# EAGLE board Schematic (EAGLE 7.3.0)

Size 100 x 80 mm. Coordinates in mm from the lower left corner, seen from the top.
Outline: 0,0 100,0 100,80 0,80 0,0
Copper layers (1*16): Top 0.035mm / dielectric 1.5mm / Bottom 0.035mm
Design rules "default": minimum track width 10mil, minimum drill 24mil, track to track 8mil, track to pad 8mil, pad to pad 8mil, via to via 8mil, smd to smd 8mil, copper to edge 40mil, drill to drill 8mil, minimum pad ring 10mil, minimum via ring 8mil, stop-mask expansion 4mil, vias tented up to drill 0mil, thermal gap 10mil
Holes 5 mm at 3.81,10.16 24.13,76.2 95.25,74.93 64.77,7.62

## Footprints (pad centres in the part's own frame; a part is rotated, then mirrored left to right if it is on the bottom)
1X03/90 = drill 1.016 long: 1 -2.54,-3.81; 2 0,-3.81; 3 2.54,-3.81
R1206 = smd 1.6 x 1.803: 1 -1.422,0; 2 1.422,0
C1608 = smd 1.1 x 1: 1 -0.85,0; 2 0.85,0
DO214AA = smd 1.8 x 2.2: A 2.55,0; C -2.55,0
TQFP32-08 = smd 1.27 x 0.559: 1 -4.293,2.8; 2 -4.293,2; 3 -4.293,1.2; 4 -4.293,0.4; 5 -4.293,-0.4; 6 -4.293,-1.2; 7 -4.293,-2; 8 -4.293,-2.8; 17 4.293,-2.8; 18 4.293,-2; 19 4.293,-1.2; 20 4.293,-0.4; 21 4.293,0.4; 22 4.293,1.2; 23 4.293,2; 24 4.293,2.8 | smd 0.559 x 1.27: 9 -2.8,-4.293; 10 -2,-4.293; 11 -1.2,-4.293; 12 -0.4,-4.293; 13 0.4,-4.293; 14 1.2,-4.293; 15 2,-4.293; 16 2.8,-4.293; 25 2.8,4.293; 26 2,4.293; 27 1.2,4.293; 28 0.4,4.293; 29 -0.4,4.293; 30 -1.2,4.293; 31 -2,4.293; 32 -2.8,4.293
DCJ0202 = drill 1 pad 2 long: 1 0,3.1; 2 4.8,0; 3 0,-3
1X06/90 = drill 1.016 long: 1 -6.35,-3.81; 2 -3.81,-3.81; 3 -1.27,-3.81; 4 1.27,-3.81; 5 3.81,-3.81; 6 6.35,-3.81
TO92-INLINE = drill 0.813 pad 1.676 octagon: 1 -2.159,0; 2 0,0; 3 2.159,0
MICRO3 = smd 0.8 x 0.9: 1 -0.95,-1; 2 0.95,-1; 3 0,1
B3F-10XX = drill 1.016 long: 1 -3.251,2.261; 2 3.251,2.261; 3 -3.251,-2.261; 4 3.251,-2.261
CR03N = drill 1.321 pad 3.15 octagon: + -5.08,-5.08; +@1 -5.08,5.08; - 6.985,0
SMC_C = smd 2.4 x 2.4: + -2.5,0; - 2.5,0
SOIC-16W = smd 0.6 x 2.2: 1 -4.445,-4.6; 2 -3.175,-4.6; 3 -1.905,-4.6; 4 -0.635,-4.6; 5 0.635,-4.6; 6 1.905,-4.6; 7 3.175,-4.6; 8 4.445,-4.6; 9 4.445,4.6; 10 3.175,4.6; 11 1.905,4.6; 12 0.635,4.6; 13 -0.635,4.6; 14 -1.905,4.6; 15 -3.175,4.6; 16 -4.445,4.6
M1206 = smd 1.6 x 2: 1 -1.4,0; 2 1.4,0
SDCARD = smd 1.2 x 4: 1 6.8,0.89; 2 4.3,0.89; 3 1.8,0.89; 4 -0.7,0.89; 5 -3.1,0.89; 6 -5.7,0.89; 7 -8.1,0.89; 8 -9.8,0.89; 9 9.3,0.89; CD -12.5,0.89 | smd 2.032 x 2.032: COM -14.2,-9.3; WP -14.2,-19 | smd 1.7 x 1.8: MT1 -14.5,-3.91 | smd 1.9 x 1.9: MT2 14.7,-3.91; MT3 14.6,-19.01 | hole 1.5: -12,-23.31 | hole 1: 12,-23.31
SFH206 = drill 0.813 long: A 0,-1.27; K 0,1.27
SO08 = smd 0.6 x 2.2: 1 -1.905,-2.6; 2 -0.635,-2.6; 3 0.635,-2.6; 4 1.905,-2.6; 5 1.905,2.6; 6 0.635,2.6; 7 -0.635,2.6; 8 -1.905,2.6
LED5MM = drill 0.813 pad 1.676 octagon: A -1.27,0; K 1.27,0
MOLEX_52207-0485 = smd 0.61 x 1.905: 1 1.499,4.801; 2 0.508,4.801; 3 -0.508,4.801; 4 -1.499,4.801 | smd 2.108 x 2.794: 5 -4.648,7.137; 6 4.648,7.137

## Placement (x,y rotation side)
1WIRE1:JP1  [1X03/90]  48.26,63.5 0 top
1WIRE1:R2  4,7k  [R1206]  48.26,53.34 0 top
C4  100nF  [C1608]  17.78,62.23 0 top
D1  [DO214AA]  59.69,62.23 0 top
IC1  MEGA8-AI  [TQFP32-08]  29.21,41.91 0 top
J1  DCJ0202  [DCJ0202]  5.08,55.88 90 top
JP1  FTDI friend  [1X06/90]  7.62,71.12 270 top
POWER_SUPPLY1:C1  0.33nF  [C1608]  8.89,41.91 0 top
POWER_SUPPLY1:C2  100nF  [C1608]  8.89,38.1 0 top
POWER_SUPPLY1:C3  100nF  [C1608]  3.81,41.91 0 top
POWER_SUPPLY1:IC2  MCP1700 3302E  [TO92-INLINE]  10.16,46.99 0 top
Q1  IRLML5203  [MICRO3]  66.04,54.61 0 top
R1  1M  [R1206]  15.24,27.94 90 top
R2  10k  [R1206]  64.77,41.91 0 top
R3  10k  [R1206]  63.5,35.56 0 top
RESET  [B3F-10XX]  6.35,27.94 0 top
RTC1:BACKUP_BAT  CR03N  [CR03N]  27.94,24.13 90 top
RTC1:C1  [SMC_C]  40.64,22.86 180 top
RTC1:C2  [SMC_C]  40.64,29.21 0 top
RTC1:IC1  [SOIC-16W]  52.07,25.4 0 top
RTC1:R1  [M1206]  45.72,38.1 0 top
RTC1:R2  [M1206]  54.61,38.1 0 top
SD1:R2  10k  [M1206]  77.47,48.26 90 top
SD1:U$1  SDMMC18650  [SDCARD]  83.82,30.48 0 top
VIZ1:D1  SFH206  [SFH206]  76.2,67.31 0 top
VIZ1:IC1  LM358D  [SO08]  86.36,68.58 0 top
VIZ1:LED1  [LED5MM]  87.63,59.69 0 top
VIZ1:R1  1M  [R1206]  77.47,59.69 0 top
VIZ1:R2  22k  [R1206]  69.85,72.39 0 top
VIZ1:R3  180k  [R1206]  71.12,62.23 0 top
VIZ1:R4  [R1206]  1.27,-5.08 0 top  (outside the outline)
VIZ1:U1  52207-0485  [MOLEX_52207-0485]  49.53,0 0 top
WAKE_UP  [B3F-10XX]  6.35,19.05 0 top

## Library data of the parts
1WIRE1:JP1 = pinhead; OC_FARNELL: unknown
1WIRE1:R2 = resistor; MF: PANASONIC ELECTRONIC COMPONENTS; MPN: ERJB1AF472U; OC_FARNELL: 2293982RL
C4 POWER_SUPPLY1:C2 POWER_SUPPLY1:C3 = eagle-ltspice; MF: AVX; MPN: 02016D104KAT2A; OC_FARNELL: 2280755; SPICEMODEL: NONE; SPICEPREFIX: C
D1 = diode; OC_FARNELL: unknown
IC1 = avr-6; OC_FARNELL: unknown
J1 = con-jack; OC_FARNELL: unknown; OC_NEWARK: unknown
JP1 = pinhead; OC_FARNELL: unknown; VV: v,,v
POWER_SUPPLY1:C1 = eagle-ltspice; MF: AVX; MPN: 0201YC331KAT2A; OC_FARNELL: 1327618RL; SPICEMODEL: NONE; SPICEPREFIX: C
POWER_SUPPLY1:IC2 = adafruit; MF: MICROCHIP; MPN: MCP1700-3302E/TO; OC_FARNELL: 1296588
Q1 = transistor-power; MF: FAIRCHILD SEMICONDUCTOR; MPN: FDN360P; OC_FARNELL: 9846336
R1 = resistor; OC_FARNELL: unknown
R2 R3 RTC1:C1 RTC1:C2 SD1:R2 VIZ1:R1 VIZ1:R2 = rcl; OC_FARNELL: unknown
RESET WAKE_UP = switch-omron; MF: OMRON ELECTRONIC COMPONENTS; MPN: B3F-1000; OC_FARNELL: 176432; OC_NEWARK: 36M3542
RTC1:BACKUP_BAT = battery; OC_FARNELL: unknown
RTC1:IC1 = DS3231_industrialberry; OC_FARNELL: unknown
RTC1:R1 RTC1:R2 = resistor; MF: BOURNS; MPN: CRM1206-FX-10R0ELF; OC_FARNELL: 1865248RL
SD1:U$1 = adafruit; OC_FARNELL: unknown
VIZ1:D1 = opto-trans-siemens; MF: OSRAM; MPN: SFH206K; OC_FARNELL: 1212741; OC_NEWARK: 01M8807
VIZ1:IC1 = linear; MF: TEXAS INSTRUMENTS; MPN: LM358DR; OC_FARNELL: 1648685
VIZ1:LED1 = adafruit; MF: WURTH ELEKTRONIK; MPN: 151053GS03000; OC_FARNELL: 2322123
VIZ1:R3 = rcl; MF: TE CONNECTIVITY; MPN: CRGH1206F180K; OC_FARNELL: 2332170
VIZ1:R4 = rcl
VIZ1:U1 = Molex_By_element14_Batch_1; MPN: 52207-0485; OC_FARNELL: 1463013; OC_NEWARK: 58J9499; PACKAGE: SOCKET FPC, SMT, 1MM, 4 WAY; SUPPLIER: Molex

## Nets
DTR: C4.1 JP1.6
GND: 1WIRE1:JP1.3 IC1.5 J1.1 JP1.1 JP1.2 R1.1 RESET.4 RTC1:BACKUP_BAT.- RTC1:C1.- RTC1:C2.- RTC1:IC1.5 RTC1:IC1.6 RTC1:IC1.7 RTC1:IC1.8 RTC1:IC1.9 RTC1:IC1.10 RTC1:IC1.11 RTC1:IC1.12 RTC1:IC1.13 SD1:U$1.COM SD1:U$1.MT1 VIZ1:D1.A VIZ1:IC1.4 VIZ1:LED1.K VIZ1:R2.1 VIZ1:U1.4 VIZ1:U1.5 VIZ1:U1.6 WAKE_UP.4
N$1: IC1.9 Q1.1
N$2: J1.3 POWER_SUPPLY1:C2.1 POWER_SUPPLY1:IC2.2
N$3: C4.2 IC1.29 R1.2 RESET.2
N$7: POWER_SUPPLY1:C1.2 POWER_SUPPLY1:C2.2 POWER_SUPPLY1:C3.2 POWER_SUPPLY1:IC2.1
N$9: IC1.28 R3.2 RTC1:R1.2
N$10: IC1.27 R2.2 RTC1:R2.2
N$11: IC1.16
N$12: IC1.15 SD1:U$1.2
N$13: IC1.17
N$14: IC1.14 SD1:R2.1 SD1:U$1.1
N$15: IC1.32 RTC1:IC1.3 WAKE_UP.2
N$16: 1WIRE1:JP1.2 1WIRE1:R2.1 IC1.12
N$17: D1.C R2.1 R3.1
N$18: IC1.23 VIZ1:R4.2 VIZ1:U1.2
N$19: IC1.24 VIZ1:IC1.1 VIZ1:R3.2
RTC1:32KHZ: RTC1:IC1.1
RTC1:N$1: RTC1:IC1.15 RTC1:R2.1
RTC1:N$2: RTC1:IC1.16 RTC1:R1.1
RTC1:VBAT: RTC1:BACKUP_BAT.+ RTC1:C1.+ RTC1:IC1.14
RX: IC1.31 JP1.5
SD1:MISO: SD1:U$1.7
SD1:SCK: SD1:U$1.5
SD1:WRITE_PROTECT: SD1:U$1.WP
TX: JP1.4
VCC: POWER_SUPPLY1:C1.1 POWER_SUPPLY1:C3.1 POWER_SUPPLY1:IC2.3 Q1.2 RTC1:C2.+ RTC1:IC1.2 SD1:R2.2 SD1:U$1.3 SD1:U$1.6 VIZ1:IC1.8 VIZ1:R1.2
VCC5V: J1.2 JP1.3
VIZ1:N$1: VIZ1:D1.K VIZ1:IC1.2 VIZ1:R1.1
VIZ1:N$2: VIZ1:LED1.A VIZ1:R4.1
VIZ1:N$3: VIZ1:IC1.3 VIZ1:R2.2 VIZ1:R3.1
VSS_SWITCHED: 1WIRE1:JP1.1 1WIRE1:R2.2 D1.A Q1.3

## Tracks (layer width: path | path; a pad name or v marks a point on that pad's centre or on a via)
DTR  (1 unrouted)
GND  (28 unrouted)
N$1  (1 unrouted)
N$2  (2 unrouted)
N$3  (3 unrouted)
N$7  (3 unrouted)
N$9  (2 unrouted)
N$10  (2 unrouted)
N$12  (1 unrouted)
N$14  (2 unrouted)
N$15  (2 unrouted)
N$16  (2 unrouted)
N$17  (2 unrouted)
N$18  (2 unrouted)
N$19  (2 unrouted)
RTC1:N$1  (1 unrouted)
RTC1:N$2  (1 unrouted)
RTC1:VBAT  (2 unrouted)
RX  (1 unrouted)
VCC  (10 unrouted)
VCC5V  (1 unrouted)
VIZ1:N$1  (2 unrouted)
VIZ1:N$2  (1 unrouted)
VIZ1:N$3  (2 unrouted)
VSS_SWITCHED  (3 unrouted)